# Allegro board codec_board_with_nets.brd
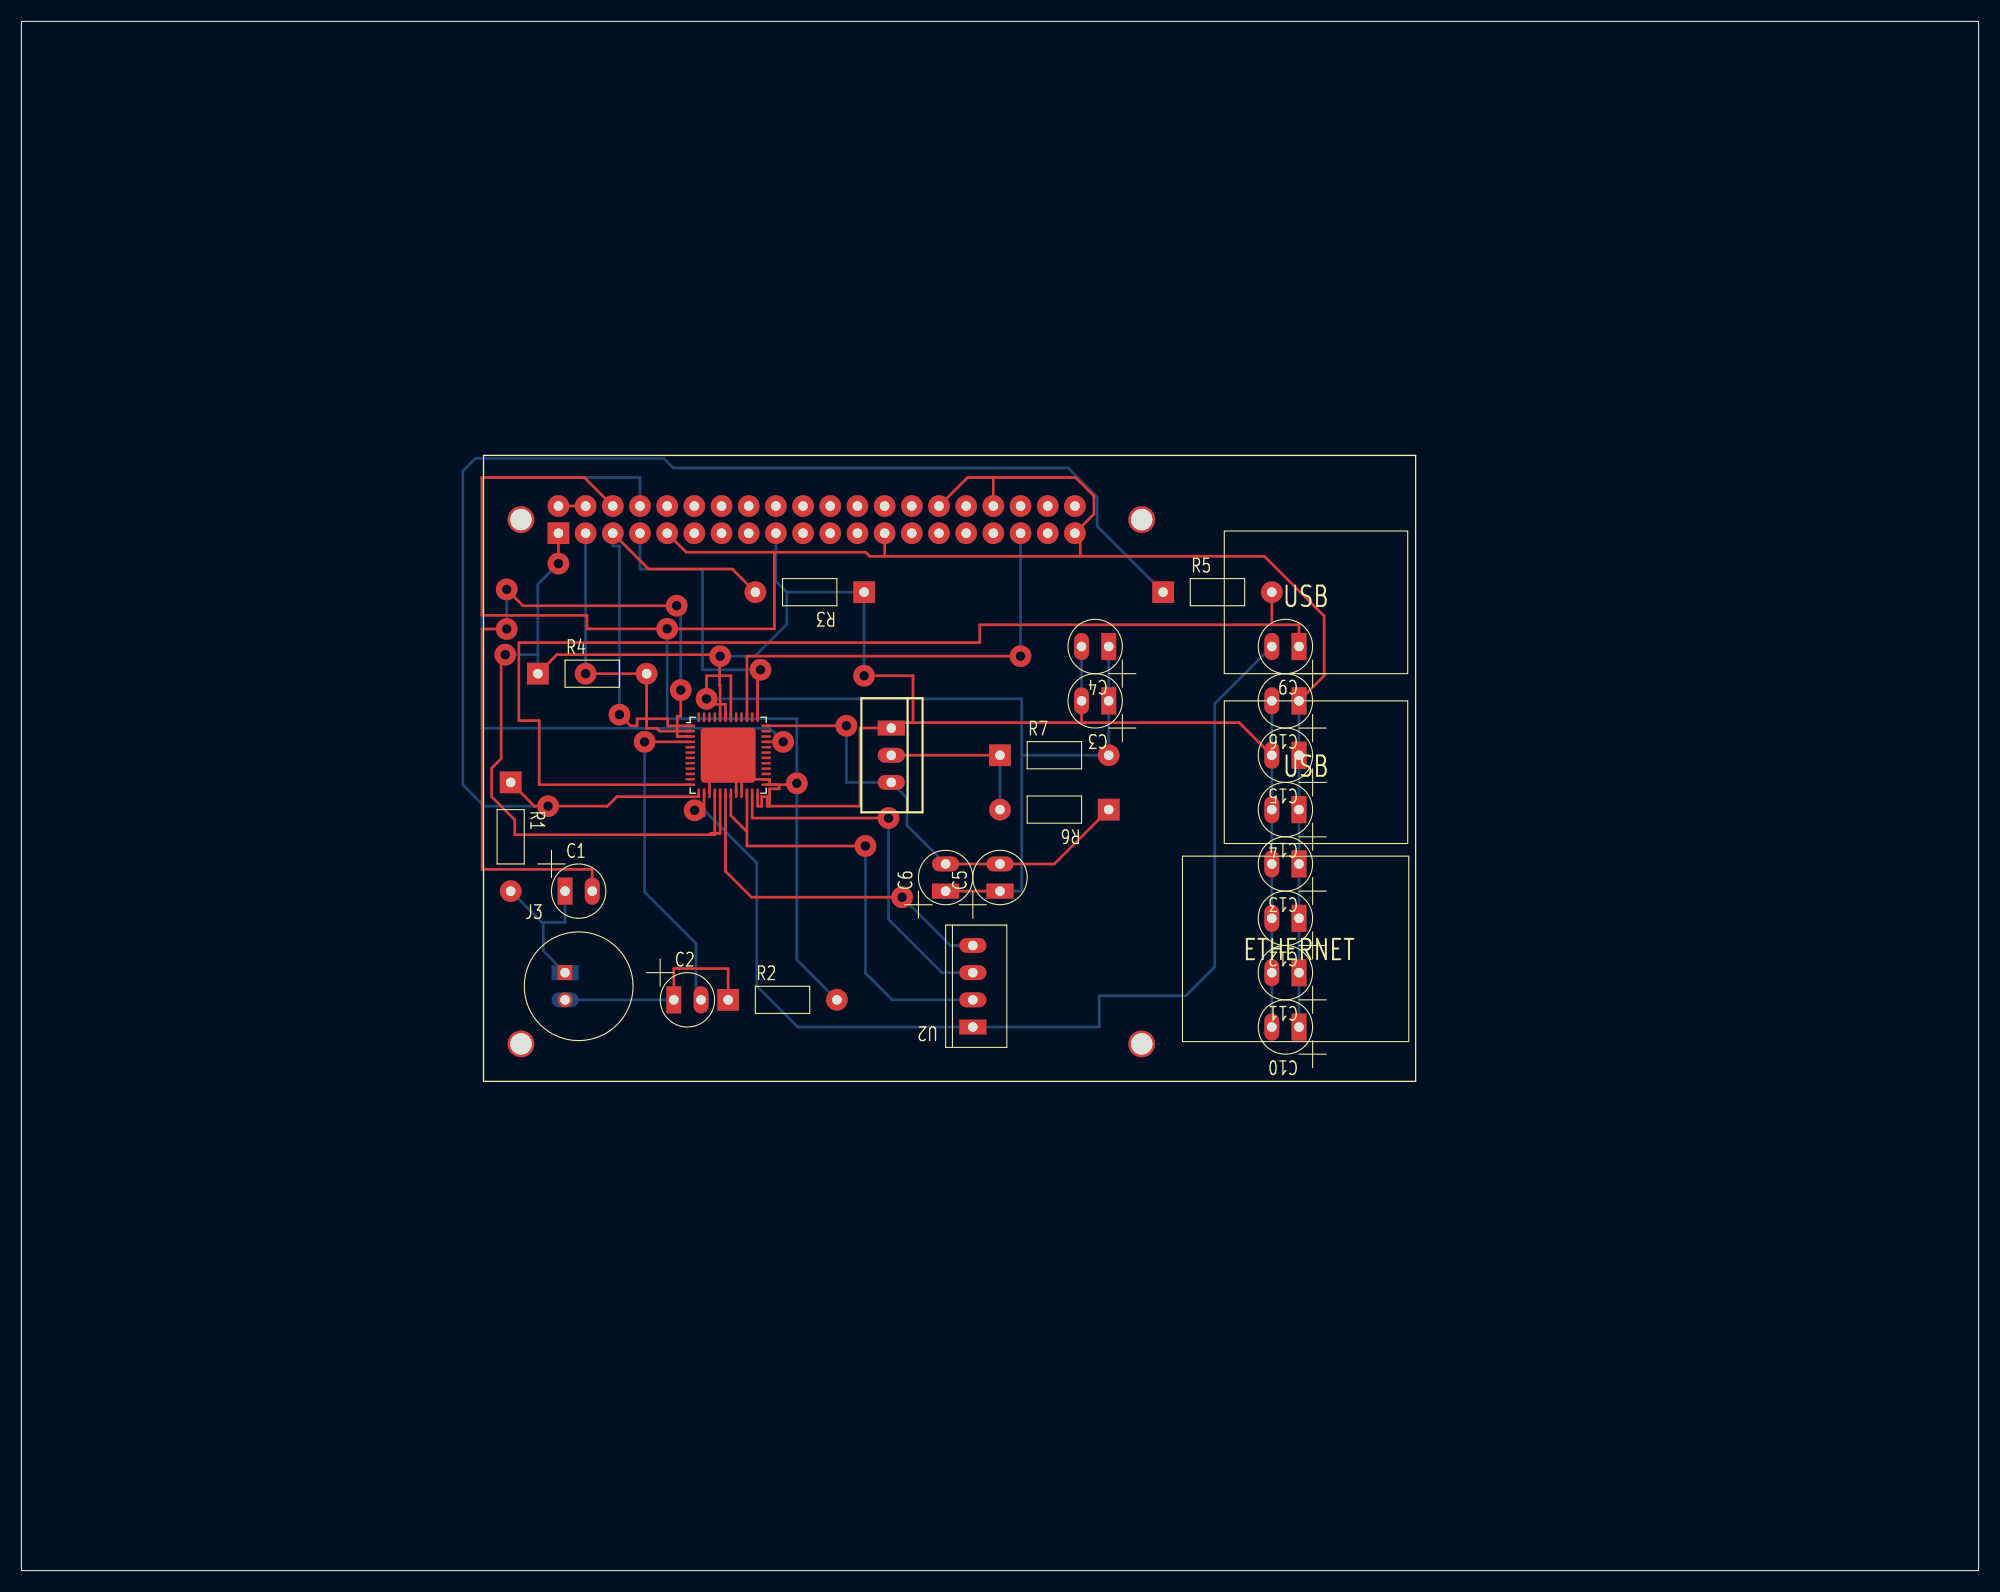
[diagram p0: board, top side]
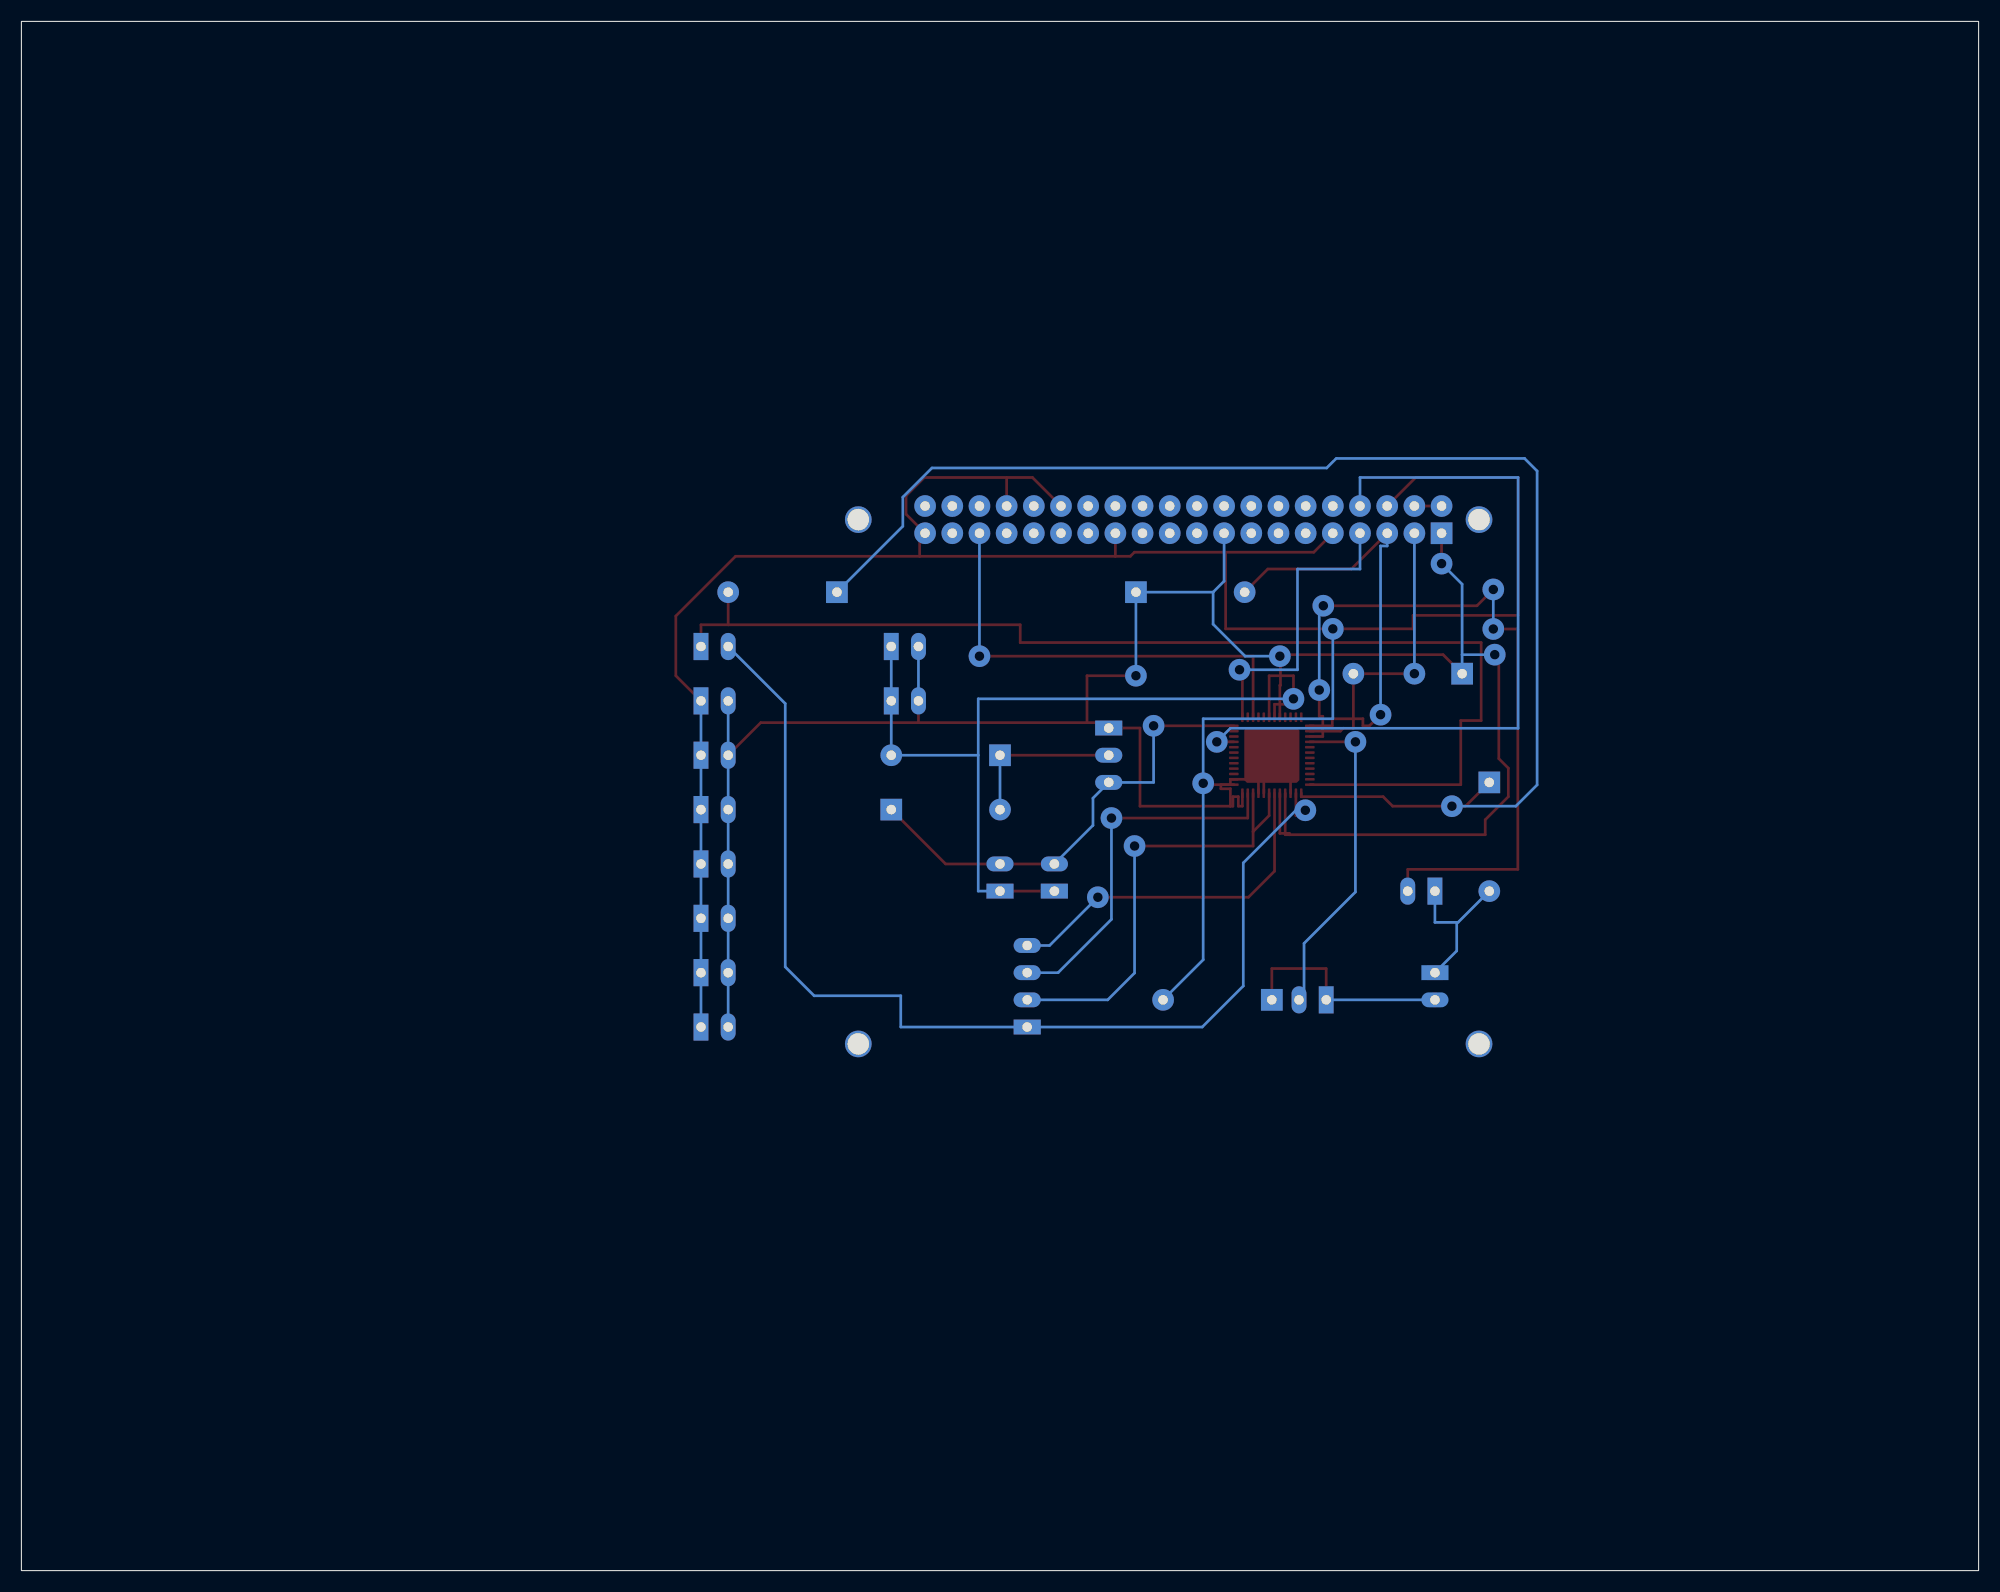
[diagram p1: board, bottom side, seen from below]

Outline 182.88 x 144.78 mm; copper layers: TOP, BOTTOM. Coordinates in mm from the lower left corner of the outline.
Outline path: rectangle 0,0 182.88,144.78

## Design rules (mm)
constraint set DEFAULT: min track width 0.254

## Placement (name value [footprint] x y rotation side)
C1  0.47uF  [GU-CAPCYL100]  50.8 63.5 0 top
C2  0.47uF  [GU-CAPCYL100]  60.96 53.34 0 top
C3  1uF  [GU-CAPCYL100]  101.6 81.28 180 top
C4  1uF  [GU-CAPCYL100]  101.6 86.36 180 top
C5  1uF  [GU-CAPCYL100]  91.44 63.5 90 top
C6  1uF  [GU-CAPCYL100]  86.36 63.5 90 top
C9  0.47uF  [GU-CAPCYL100]  119.38 86.36 180 top
C10  1uF  [GU-CAPCYL100]  119.38 50.8 180 top
C11  1uF  [GU-CAPCYL100]  119.38 55.88 180 top
C12  1uF  [GU-CAPCYL100]  119.38 60.96 180 top
C13  1uF  [GU-CAPCYL100]  119.38 66.04 180 top
C14  1uF  [GU-CAPCYL100]  119.38 71.12 180 top
C15  1uF  [GU-CAPCYL100]  119.38 76.2 180 top
C16  1uF  [GU-CAPCYL100]  119.38 81.28 180 top
J1  TLV320AIC33  [QFN49P50_700X700X100L40X24T515]  66.04 76.2 270 top
J3  Mic  [GU-MIC100]  50.8 55.88 0 top
R1  1k  [GU-RC400]  45.72 73.66 270 top
R2  1k  [GU-RC400]  66.04 53.34 0 top
R3  10k  [GU-RC400]  78.74 91.44 180 top
R4  10k  [GU-RC400]  48.26 83.82 0 top
R5  2k  [GU-RC400]  106.68 91.44 0 top
R6  1k  [GU-RC400]  101.6 71.12 180 top
R7  1k  [GU-RC400]  91.44 76.2 0 top
U1  Raspberry Pi B+  [GU-RASP-PI-3]  43.18 45.72 0 top
U2  Aux Out  [GU-MOLEX4]  88.9 50.8 180 top
U4  LM317_H  [GU-TO220AB]  81.28 78.74 270 top

## Library data of the parts
C1-C6 C9-C16 = CAP NP
J1 = CON50A_2
J3 = CON2
R1-R7 = RESISTOR
U1 = Raspberry Pi B+_0
U2 = 2MMCONN4
U4 = LM317_H

## Footprints (pads in the part's own frame, mm; a bottom-side part is the same pattern mirrored in y, then rotated)
GU-CAPCYL100
  rect 1.397x2.54 hole 0.889: 1(0,0)
  oval 1.397x2.54 hole 0.889: 2(2.54,0)
GU-MIC100
  rect 1.397x1.397 hole 0.889: 1(0,0)
  round 1.397 hole 0.889: 2(0,-2.54)
GU-MOLEX4
  rect 2.54x1.397 hole 0.889: 1(0,0)
  oval 2.54x1.397 hole 0.889: 2(0,-2.54) 3(0,-5.08) 4(0,-7.62)
GU-RASP-PI-3
  round 2.5 hole 2 unplated: (3.5,52.5) (3.5,3.5) (61.5,52.5) (61.5,3.5)
  rect 2.032x2.032 hole 0.889: 1(7,51.23)
  round 2.032 hole 0.889: 2(7,53.77) 3(9.54,51.23) 4(9.54,53.77) 5(12.08,51.23) 6(12.08,53.77) 7(14.62,51.23) 8(14.62,53.77) 9(17.16,51.23) 10(17.16,53.77) 11(19.7,51.23) 12(19.7,53.77) 13(22.24,51.23) 14(22.24,53.77) 15(24.78,51.23) 16(24.78,53.77) 17(27.32,51.23) 18(27.32,53.77) 19(29.86,51.23) 20(29.86,53.77) 21(32.4,51.23) 22(32.4,53.77) 23(34.94,51.23) 24(34.94,53.77) 25(37.48,51.23) 26(37.48,53.77) 27(40.02,51.23) 28(40.02,53.77) 29(42.56,51.23) 30(42.56,53.77) 31(45.1,51.23) 32(45.1,53.77) 33(47.64,51.23) 34(47.64,53.77) 35(50.18,51.23) 36(50.18,53.77) 37(52.72,51.23) 38(52.72,53.77) 39(55.26,51.23) 40(55.26,53.77)
GU-RC400
  rect 2.032x2.032 hole 0.889: 1(0,0)
  round 2.032 hole 0.889: 2(10.16,0)
GU-TO220AB
  rect 1.397x2.54 hole 0.889: 1(0,0)
  oval 1.397x2.54 hole 0.889: 2(2.54,0) 3(5.08,0)
QFN49P50_700X700X100L40X24T515
  rrect 0.24x0.9 smd: 1(-2.75,-3.55) 2(-2.25,-3.55) 3(-1.75,-3.55) 4(-1.25,-3.55) 5(-0.75,-3.55) 6(-0.25,-3.55) 7(0.25,-3.55) 8(0.75,-3.55) 9(1.25,-3.55) 10(1.75,-3.55) 11(2.25,-3.55) 12(2.75,-3.55) 25(2.75,3.55) 26(2.25,3.55) 27(1.75,3.55) 28(1.25,3.55) 29(0.75,3.55) 30(0.25,3.55) 31(-0.25,3.55) 32(-0.75,3.55) 33(-1.25,3.55) 34(-1.75,3.55) 35(-2.25,3.55) 36(-2.75,3.55)
  rrect 0.9x0.24 smd: 13(3.55,-2.75) 14(3.55,-2.25) 15(3.55,-1.75) 16(3.55,-1.25) 17(3.55,-0.75) 18(3.55,-0.25) 19(3.55,0.25) 20(3.55,0.75) 21(3.55,1.25) 22(3.55,1.75) 23(3.55,2.25) 24(3.55,2.75) 37(-3.55,2.75) 38(-3.55,2.25) 39(-3.55,1.75) 40(-3.55,1.25) 41(-3.55,0.75) 42(-3.55,0.25) 43(-3.55,-0.25) 44(-3.55,-0.75) 45(-3.55,-1.25) 46(-3.55,-1.75) 47(-3.55,-2.25) 48(-3.55,-2.75)
  rrect 5.15x5.15 smd: 49(0,0)

## Nets
1.9V: C5.2 C6.2 J1.36 R6.1 U4.3(OUT)
3V3: C3.2 C4.2 C10.2 C11.2 C12.2 C13.2 C14.2 C15.2 C16.2 J1.16 J1.17 J1.24 J1.25 J1.44 R3.1 R4.1 U1.1 U1.17 U4.1
5V: U1.2 U1.4(P5V#4)
AGND: C10.1 C11.1 C12.1 C13.1 C14.1 C15.1 C16.1 J1.15 J1.20 J1.21 J1.26 J1.49 R2.2 U1.6 U1.9 U1.25 U1.30 U1.34 U1.39
DGND: C3.1 C4.1 C5.1 C6.1 J1.42 J1.43 R7.2
GND3: U1.14
GND4: U1.20
/RESET: J1.33 U1.8
BCLK: J1.38 U1.12
DIN: J1.40 U1.38
DOUT: J1.41 U1.40
HPCOM: J1.19 J1.22 U2.2
HPLOUT: J1.18 U2.4
HPROUT: J1.23 U2.3
LINE1LM: C2.2 J1.4
LINE1LP: C1.2 J1.3
MCLK: J1.37 U1.7
MIC3R: C9.2 J1.14 U2.1
MICBIAS: J1.13 R1.1 R5.1
MICDET: C9.1 J1.12 R5.2
SCL: J1.1 R3.2 U1.5
SDA: J1.2 R4.2 U1.3
WCLK: J1.39 U1.35
N00434: C1.1 J3.1 R1.2
N00441: C2.1 J3.2 R2.1
N13170: R6.2 R7.1 U4.2

Pads without a net: J1 5 6 7 8 9 10 11 27 28 29 30 31 32 34 35 45 46 47 48; U1 10 11 13 15 16 18 19 21 22 23 24 26 27 28 29 31 32 33 36 37

## Via types
v1: diameter 2.032, hole 0.889, TOP to BOTTOM, 23 vias

## Routing (per net, layer and track width the routed paths; a pad name or vN(x,y) marks a point on that pad's centre or on a via; arc(x,y) is an arc through that point)
1.9V: length 44
  TOP w0.254: C6.2 C5.2 96.52,66.04 R6.1 ; v1(77.09,78.95) J1.36
  BOTTOM w0.254: C6.2 82.75,69.65 82.75,72.19 U4.3 77.09,73.66 v1(77.09,78.95)
3V3: length 228.1
  TOP w0.254: 69.91,71.44 78.36,71.44 78.36,78.74 U4.1 81.79,79.25 83.31,79.25 ; 69.91,71.44 69.68,71.44 69.68,72.33 69.17,72.33 69.17,71.44 68.79,71.44 J1.24 ; 69.91,71.44 69.91,73.07 70.8,73.07 70.8,73.45 J1.25 ; R4.1 50.04,85.6 65.15,85.6 v1(65.29,85.46) 65.29,84.52 65.23,84.52 65.23,82.74 65.29,82.74 J1.44 ; v1(78.74,83.63) 83.31,83.63 83.31,79.25 ; 64.4,68.77 64.79,68.77 J1.16 ; 64.4,68.77 46.1,68.77 46.1,70.17 43.94,72.33 43.94,74.99 44.83,75.88 44.83,85.22 v1(45.21,85.6) ; 64.4,68.77 64.4,68.9 65.29,68.9 J1.17 ; 99.06,79.25 C3.2 ; 99.06,79.25 113.79,79.25 C15.2 ; 99.06,79.25 83.31,79.25 ; U1.1 v1(50.18,94.11)
  BOTTOM w0.254: 48.26,85.6 R4.1 ; 48.26,85.6 48.26,92.19 v1(50.18,94.11) ; 48.26,85.6 v1(45.21,85.6) ; C4.2 C3.2 ; 71.53,91.44 70.5,92.47 U1.17 ; 71.53,91.44 R3.1 v1(78.74,83.63) ; 71.53,91.44 71.53,88.45 68.54,85.46 v1(65.29,85.46) ; C16.2 C15.2 C14.2 C13.2 C12.2 C11.2 C10.2
5V: length 2.5
  TOP w0.254: U1.2 U1.4
AGND: length 257.7
  TOP w0.254: U1.6 52.59,102.16 43.03,102.16 43.03,89.27 52.84,89.27 52.84,88.01 v1(60.34,88.01) 70.36,88.01 70.36,95.17 ; 98.95,94.79 116.15,94.79 121.73,89.21 121.73,83.63 C16.1 ; 98.95,94.79 80.66,94.79 ; 98.95,94.79 98.95,96.44 U1.39 100.22,98.73 100.22,100.44 98.5,102.16 90.82,102.16 ; 80.66,94.79 79.26,94.79 78.88,95.17 70.36,95.17 ; 80.66,94.79 U1.25 ; 67.29,73.95 J1.26 69.91,73.95 69.91,73.45 72.45,73.45 v1(72.45,73.58) ; 67.29,73.95 J1.21 ; 67.29,73.95 66.79,73.95 ; U1.30 88.41,102.16 90.82,102.16 ; 90.82,102.16 U1.34 ; 70.36,95.17 62.12,95.17 U1.9 ; 66.79,73.95 66.79,75.45 J1.49 64.29,74.45 J1.15 ; 66.79,73.95 J1.20
  BOTTOM w0.254: C10.1 C11.1 C12.1 C13.1 C14.1 C15.1 C16.1 ; v1(60.34,88.01) 60.34,79.61 72.45,79.61 v1(72.45,73.58) 72.45,57.09 R2.2
DGND: length 84.6
  TOP w0.254: J1.42 66.29,83.63 64.02,83.63 v1(64.02,81.47) 64.02,80.96 65.79,80.96 J1.43 ; C6.1 C5.1
  BOTTOM w0.254: 93.47,76.2 93.47,63.5 C5.1 ; 93.47,76.2 R7.2 C3.1 C4.1 ; 93.47,76.2 93.47,81.47 v1(64.02,81.47)
/RESET: length 71.1
  TOP w0.254: v1(71.18,77.45) J1.33
  BOTTOM w0.254: v1(71.18,77.45) 69.91,78.72 43.03,78.72 43.03,102.16 57.8,102.16 U1.8
HPCOM: length 43.2
  TOP w0.254: J1.19 66.29,70.56 67.79,69.06 ; v1(78.87,67.72) 67.79,67.72 67.79,69.06 ; 67.79,69.06 J1.22
  BOTTOM w0.254: v1(78.87,67.72) 78.87,55.85 81.38,53.34 U2.2
HPLOUT: length 33.3
  TOP w0.254: v1(82.3,62.93) 68.22,62.93 65.79,65.36 J1.18
  BOTTOM w0.254: U2.4 86.8,58.42 v1(82.3,62.93)
HPROUT: length 34.5
  TOP w0.254: v1(81.03,70.33) 68.29,70.33 J1.23
  BOTTOM w0.254: v1(81.03,70.33) 81.03,60.87 86.01,55.88 U2.3
LINE1LM: length 30.6
  TOP w0.254: J1.4 v1(58.23,77.45)
  BOTTOM w0.254: v1(58.23,77.45) 58.23,63.42 63.03,58.62 63.03,53.81 C2.2
LINE1LP: length 71.2
  TOP w0.254: v1(61.23,90.17) 46.87,90.17 v1(45.35,91.69) ; v1(61.61,82.29) 61.61,79.84 61.28,79.84 61.28,77.95 J1.3 ; C1.2 53.34,65.53 43.05,65.53 43.05,88 v1(45.35,88)
  BOTTOM w0.254: v1(61.61,82.29) 61.61,89.79 v1(61.23,90.17) ; v1(45.35,91.69) v1(45.35,88)
MCLK: length 28.6
  TOP w0.254: v1(69.06,84.19) 68.79,83.92 J1.37
  BOTTOM w0.254: v1(69.06,84.19) 63.64,84.19 63.64,93.6 57.8,93.6 U1.7
MIC3R: length 103.4
  TOP w0.254: v1(62.91,71.06) 63.29,71.06 63.29,70.55 63.79,70.55 J1.14
  BOTTOM w0.254: C9.2 111.51,81.03 111.51,56.42 108.81,53.72 100.71,53.72 100.71,50.8 U2.1 72.54,50.8 68.71,54.64 68.71,66.14 63.79,71.06 v1(62.91,71.06)
MICBIAS: length 130
  TOP w0.254: R1.1 47.94,71.44 v1(49.21,71.44) 54.75,71.44 55.64,72.33 63.29,72.33 J1.13
  BOTTOM w0.254: R5.1 100.52,97.6 100.52,100.32 97.8,103.05 60.91,103.05 60.02,103.94 42.42,103.94 41.25,102.76 41.25,73.43 43.24,71.44 v1(49.21,71.44)
MICDET: length 108.9
  TOP w0.254: C9.1 119.38,88.39 116.84,88.39 ; R5.2 116.84,88.39 ; 116.84,88.39 89.55,88.39 89.55,86.73 46.48,86.73 46.48,79.44 48.39,79.44 48.39,73.45 J1.12
SCL: length 41.5
  TOP w0.254: R3.2 66.42,93.6 58.61,93.6 U1.5 ; J1.1 60.39,78.95 60.39,79.61 57.53,79.61 57.53,78.95 56.92,78.95 v1(55.88,79.99)
  BOTTOM w0.254: v1(55.88,79.99) 55.88,95.76 55.26,95.76 U1.5
SDA: length 28.1
  TOP w0.254: v1(52.72,83.82) R4.2 58.42,78.72 59.37,78.72 59.64,78.45 J1.2
  BOTTOM w0.254: U1.3 v1(52.72,83.82)
WCLK: length 42.8
  TOP w0.254: J1.39 67.79,85.46 v1(93.36,85.46)
  BOTTOM w0.254: U1.35 v1(93.36,85.46)
N00434: length 14.8
  BOTTOM w0.254: 48.77,60.58 48.64,60.58 R1.2 ; 48.77,60.58 48.77,57.91 J3.1 ; 48.77,60.58 50.8,60.58 C1.1
N00441: length 21.1
  TOP w0.254: C2.1 60.96,56.26 66.04,56.26 R2.1
  BOTTOM w0.254: J3.2 C2.1
N13170: length 15.2
  TOP w0.254: U4.2 R7.1
  BOTTOM w0.254: R6.2 R7.1
